# EAGLE board sensor_ring (EAGLE 5.07)
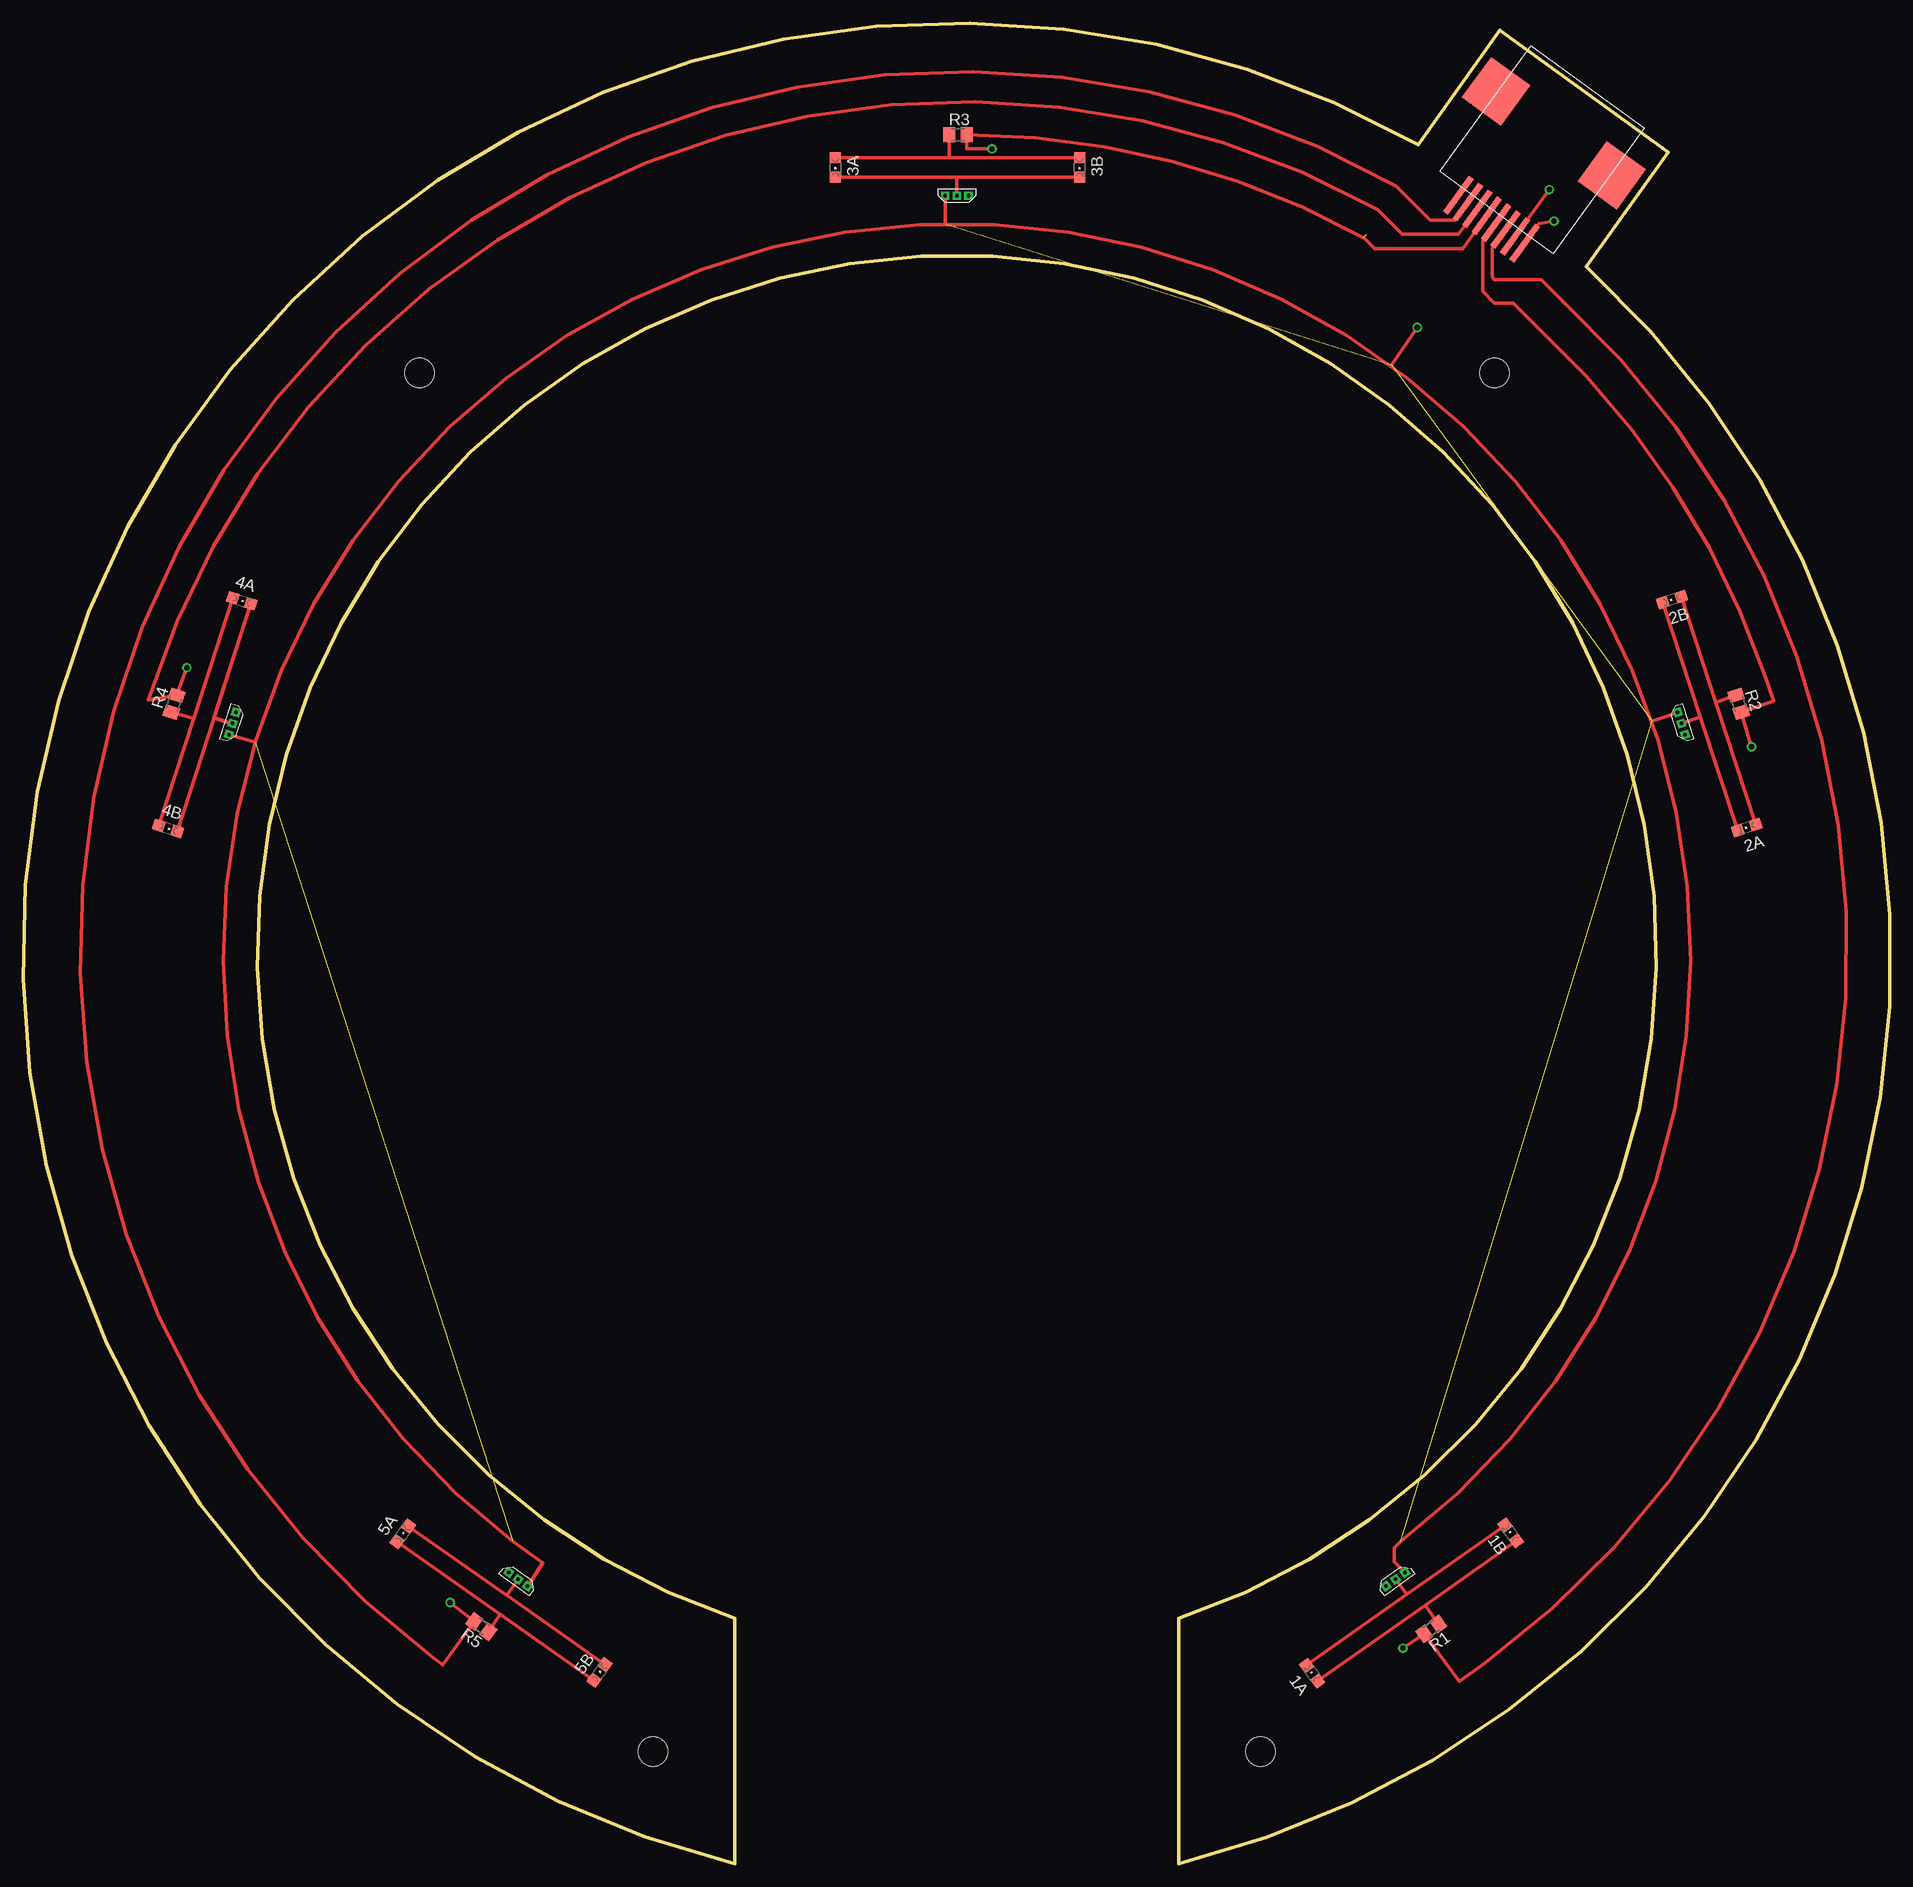
[diagram p0: board, top side]
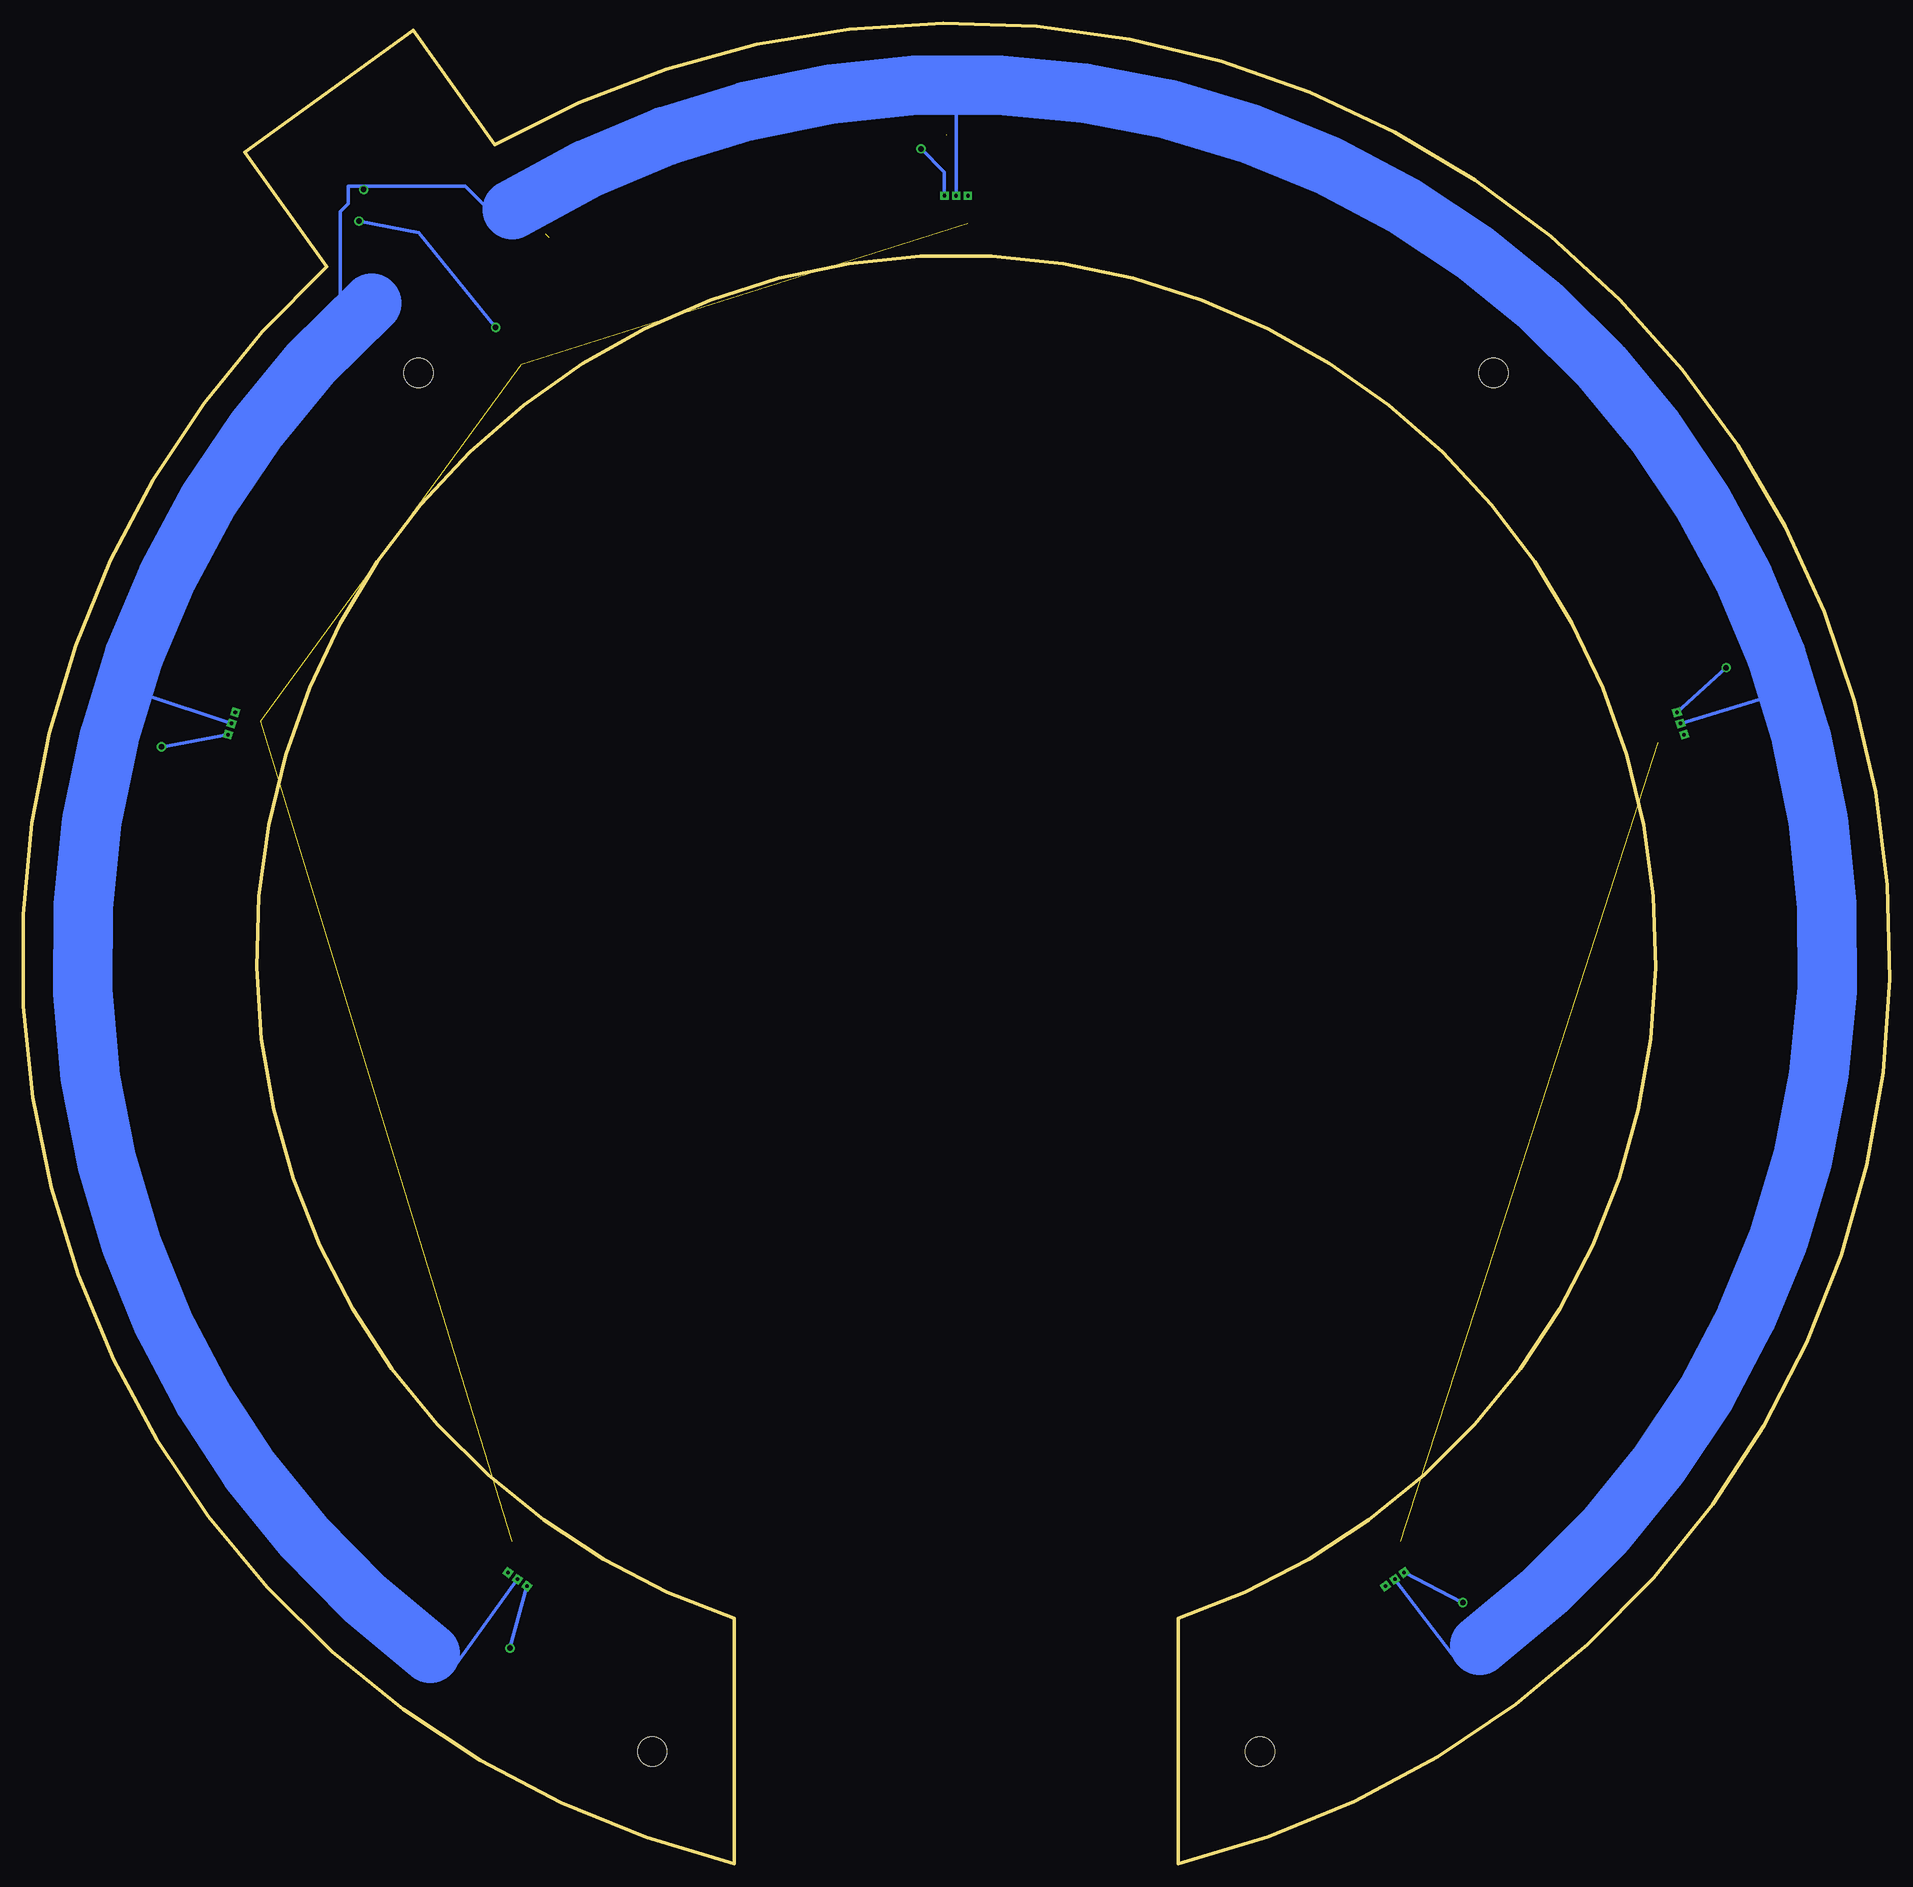
[diagram p1: board, bottom side, seen from below]

Size 202.91 x 200.11 mm. Coordinates in mm from the lower left corner, seen from the top.
Outline: 151.64,186.86 arc196 77.37,0 77.37,26.67 arc-323 125.63,26.67 125.63,0 arc124 169.9,173.6 178.79,186.04 160.51,199.32 151.62,186.88
Copper layers (1*16): Top 0.035mm / dielectric 1.5mm / Bottom 0.035mm
Design rules "default": minimum track width 10mil, minimum drill 24mil, track to track 8mil, track to pad 8mil, pad to pad 8mil, via to via 8mil, smd to smd 8mil, copper to edge 40mil, drill to drill 8mil, minimum pad ring 10mil, minimum via ring 8mil, stop-mask expansion 4mil, vias tented up to drill 0mil, thermal gap 10mil
Holes 3.2 mm at 43.08,162.05 159.92,162.05 68.48,12.19 134.52,12.19

## Footprints (pad centres in the part's own frame; a part is rotated, then mirrored left to right if it is on the bottom)
0805 = smd 1.2 x 1.2: A 0,-1.05; C 0,1.05
M0805 = smd 1.3 x 1.6: 1 -0.95,0; 2 0.95,0
SS49E = drill 0.381 square: P$1 -1.27,0; P$2 0,0; P$3 1.27,0
RJ45-SMT = smd 0.635 x 4.75: P$A 3.175,17.78; P$B 4.445,17.78; P$C 5.715,17.78; P$D 6.985,17.78; P$E 8.255,17.78; P$F 9.525,17.78; P$G 10.795,17.78; P$H 12.065,17.78 | smd 5.24 x 5.4: SH1 -0.15,6.24; SH2 15.39,6.24

## Placement (x,y rotation side)
1A  598-8110-107F  [0805]  140.11,20.7 36 top
1B  598-8110-107F  [0805]  161.7,35.94 36 top
2A  598-8110-107F  [0805]  187.35,112.65 108 top
2B  598-8110-107F  [0805]  179.22,137.41 108 top
3A  598-8110-107F  [0805]  88.29,184.4 180 top
3B  598-8110-107F  [0805]  114.83,184.4 180 top
4A  598-8110-107F  [0805]  23.77,137.29 252 top
4B  598-8110-107F  [0805]  15.77,112.52 252 top
5A  598-8110-107F  [0805]  41.27,35.84 324 top
5B  598-8110-107F  [0805]  62.66,20.78 324 top
R1  [M0805]  153.06,25.53 216 top
R2  [M0805]  186.46,126.11 288 top
R3  [M0805]  101.62,187.96 0 top
R4  [M0805]  16.41,126.11 72 top
R5  [M0805]  49.81,25.78 144 top
S1  SS49E  [SS49E]  149.17,30.91 216 top
S2  SS49E  [SS49E]  180.24,123.95 288 top
S3  SS49E  [SS49E]  101.5,181.33 0 top
S4  SS49E  [SS49E]  22.76,123.95 72 top
S5  SS49E  [SS49E]  53.82,30.91 144 top
U$1  AMPHENOL_RJ45  [RJ45-SMT]  176.22,188.68 144 top

## Library data of the parts
1A 1B 2A 2B 3A 3B 4A 4B 5A 5B S1-S5 U$1 = excitebike
R1-R5 = resistor

## Nets
GND: 1A.C 1B.C 2A.C 2B.C 3A.C 3B.C 4A.C 4B.C 5A.C 5B.C S1.P$2 S2.P$2 S3.P$2 S4.P$2 S5.P$2 U$1.P$B
N$2: 1A.A 1B.A R1.1
N$8: R1.2 S1.P$3 U$1.P$C
N$9: 2A.A 2B.A R2.1
N$10: R2.2 S2.P$3 U$1.P$D
N$11: 3A.A 3B.A R3.1
N$12: R3.2 S3.P$3 U$1.P$E
N$13: 4A.A 4B.A R4.1
N$14: R4.2 S4.P$3 U$1.P$F
N$15: 5A.A 5B.A R5.1
N$16: R5.2 S5.P$3 U$1.P$G
VCC: S1.P$1 S2.P$1 S3.P$1 S4.P$1 S5.P$1 U$1.P$A

## Tracks (layer width: path | path; a pad name or v marks a point on that pad's centre or on a via)
GND  (via drill 0.6)
  Top 0.406: v165.89,181.99 U$1.P$B | 20.78,124.61 4A.C 20.75,124.54 22.76,123.9 S4.P$2 20.78,124.61 | 20.78,124.61 4B.C | 1B.C 150.4,29.25 | 150.4,29.25 1A.C | 182.31,124.65 2A.C | 182.31,124.65 2B.C | 150.4,29.25 S1.P$2 | 5B.C 52.67,29.1 52.57,29.17 | 52.57,29.17 5A.C | S5.P$2 52.57,29.17 | S2.P$2 182.31,124.65 | 101.5,183.35 3A.C | 101.5,183.35 3B.C | S3.P$2 101.5,183.35
  Bottom 0.406: 165.51,182.37 v165.89,181.99 | 165.51,182.37 154.84,182.37 152.3,179.83 149.76,179.83 126.9,189.99 109.04,191.78 | 165.51,182.37 167.54,182.37 167.54,180.47 168.43,179.58 168.43,167.13 | 168.43,167.13 168.43,166.75 185.32,146.81 | 185.32,146.81 192.94,129.03 189.89,127.13 S2.P$2 | S1.P$2 156.49,20.8 157.38,22.35 158.65,22.86 | 44.6,23.75 45.62,22.35 46.94,21.87 S5.P$2 | 185.32,146.81 190.4,126.49 190.17,127.23 | 109.04,191.78 101.5,192.53 S3.P$2 | 165,169.67 168.43,167.13 | S4.P$2 11.56,127.36 10.06,126.49 17.68,144.27 30.38,159.51 55.78,182.37 86.26,192.53 109.04,191.78
  Bottom 6.452: 149.76,179.83 arc174 44.6,23.75 | 158.65,22.86 arc101 165,169.67
N$2
  Top 0.406: 1B.A 152.42,28.11 | 152.42,28.11 1A.A | 152.42,28.11 R1.1
N$8  (via drill 0.6)
  Top 0.406: U$1.P$C 159.66,175.64 159.66,172.47 159.92,172.21 165,172.21 167.03,170.18 | 167.03,170.18 arc-101 158.9,21.84 157.73,20.98 156.11,19.84 R1.2 v149.99,23.42 | 167.03,170.18 167.54,169.67
  Bottom 0.406: S1.P$3 v149.99,23.42
N$9
  Top 0.406: 2A.A 184,126.22 | 184,126.22 2B.A | 184,126.22 R2.1
N$10  (via drill 0.6)
  Top 0.406: U$1.P$D 158.65,176.4 158.65,170.94 159.92,169.67 161.95,169.67 164.49,167.13 arc-29 189.38,129.03 190.3,126.39 R2.2 v187.86,121.41
  Bottom 0.406: S2.P$3 v187.86,121.41
N$11
  Top 0.406: 114.58,185.2 3B.A 100.66,185.45 | 3A.A 100.66,185.45 | 100.66,185.45 R3.1
N$12  (via drill 0.6)  (2 unrouted)
  Top 0.406: U$1.P$E 157.63,177.17 156.47,175.57 156.45,175.56 146.93,175.56 145.7,176.78 145.69,176.78 arc29 102.51,187.96 | v105.31,186.44 102.57,186.44 R3.2
  Bottom 0.406: S3.P$3 102.77,183.9 v105.31,186.44
N$13
  Top 0.406: 4A.A 18.54,124.5 | 18.54,124.5 4B.A | 18.54,124.5 R4.1
N$14  (via drill 0.6)
  Top 0.406: U$1.P$F 156.62,177.93 156.01,177.15 149.9,177.15 147.22,179.83 arc102 13.61,126.49 R4.2 v17.8,130.02
  Bottom 0.406: S4.P$3 v17.8,130.02
N$15
  Top 0.406: 5A.A 5B.A 51.85,27.11 R5.1
N$16  (via drill 0.6)
  Top 0.406: U$1.P$G 155.6,178.69 152.93,178.69 149.25,182.37 arc173 44.6,22.35 45.64,21.62 R5.2 v46.43,28.37
  Bottom 0.406: S5.P$3 v46.43,28.37
VCC  (via drill 0.6)  (4 unrouted)
  Top 0.406: 177.06,124.21 S2.P$1 | S4.P$1 25.17,121.92 25.22,121.87 | U$1.P$A 164.74,178.31 v166.39,178.56 | 148.74,162.94 v151.54,167 | 100.23,178.28 S3.P$1 | S1.P$1 149.05,32.81 149.05,34.34 149.76,35.05 arc286 53.24,35.05 56.51,32.72 S5.P$1
  Bottom 0.406: v166.39,178.56 159.92,177.29 v151.54,167